# EAGLE board SparkFun_Lipo_Fuel_Gauge-Panel (EAGLE 9.6.2), part 1 of 5
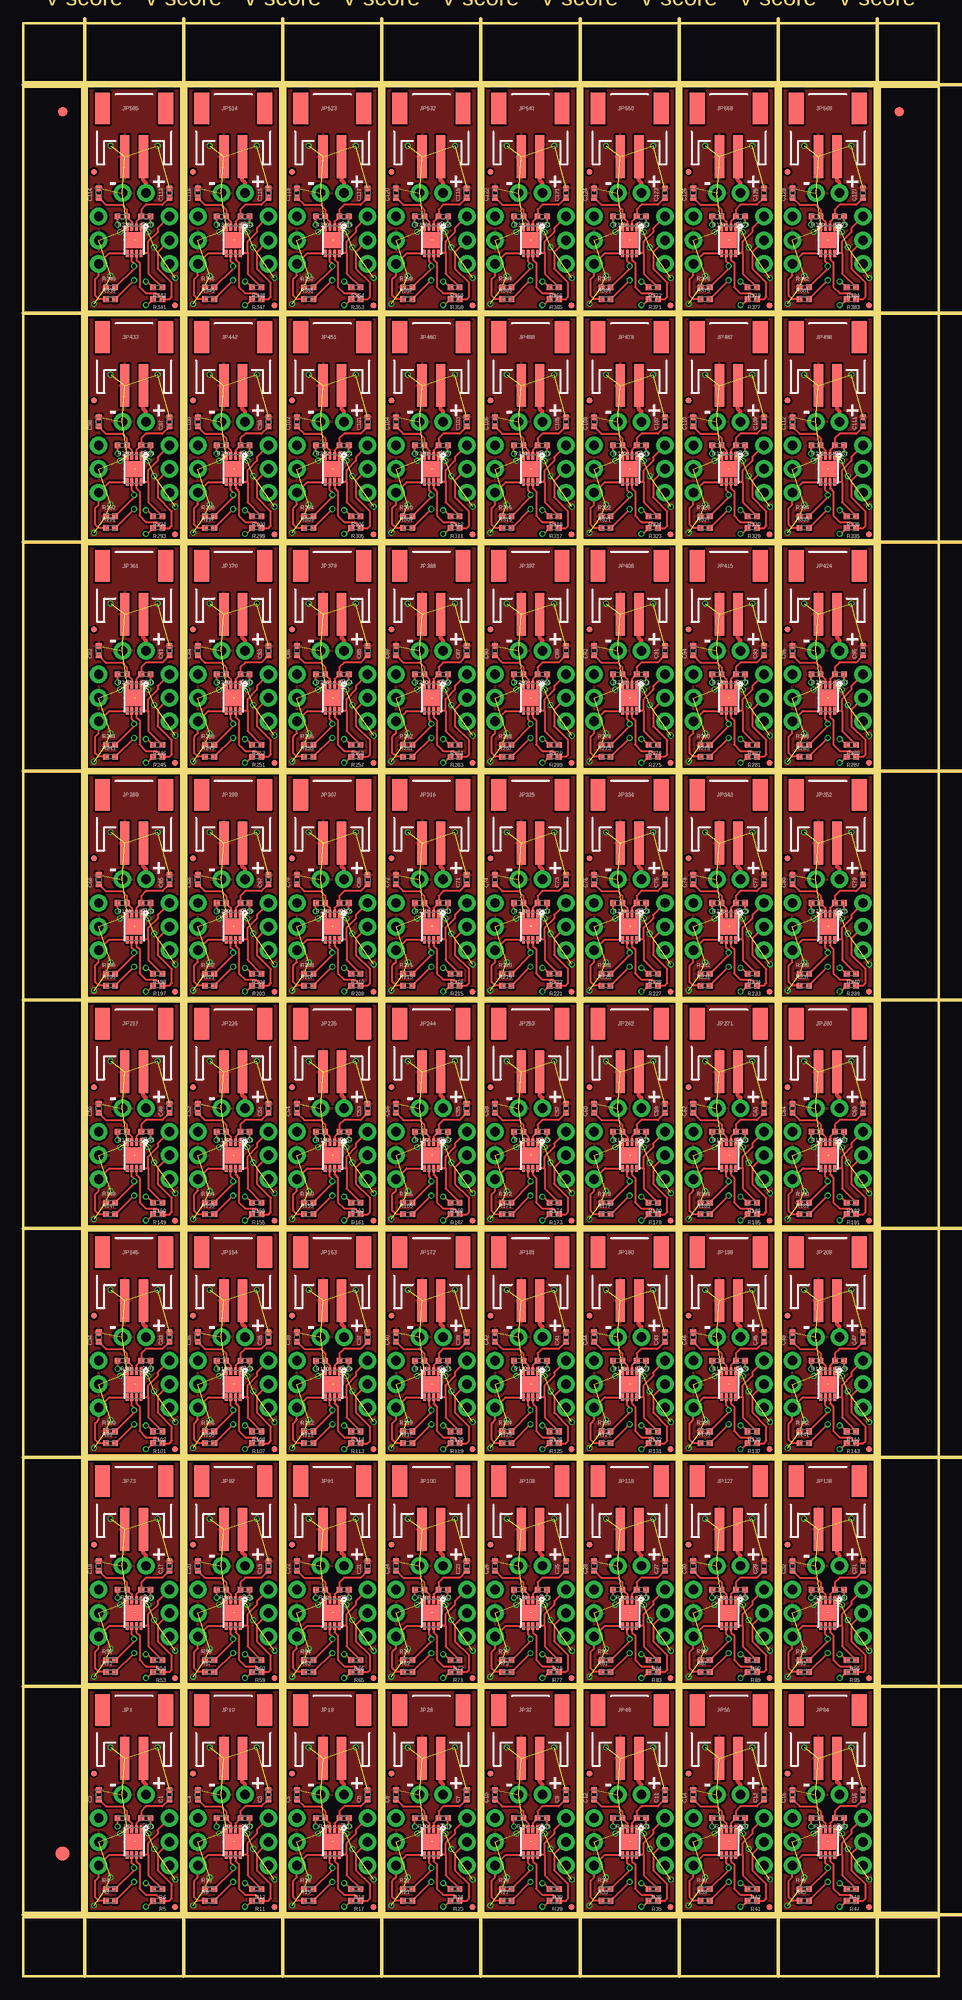
[diagram p0: board, top side]
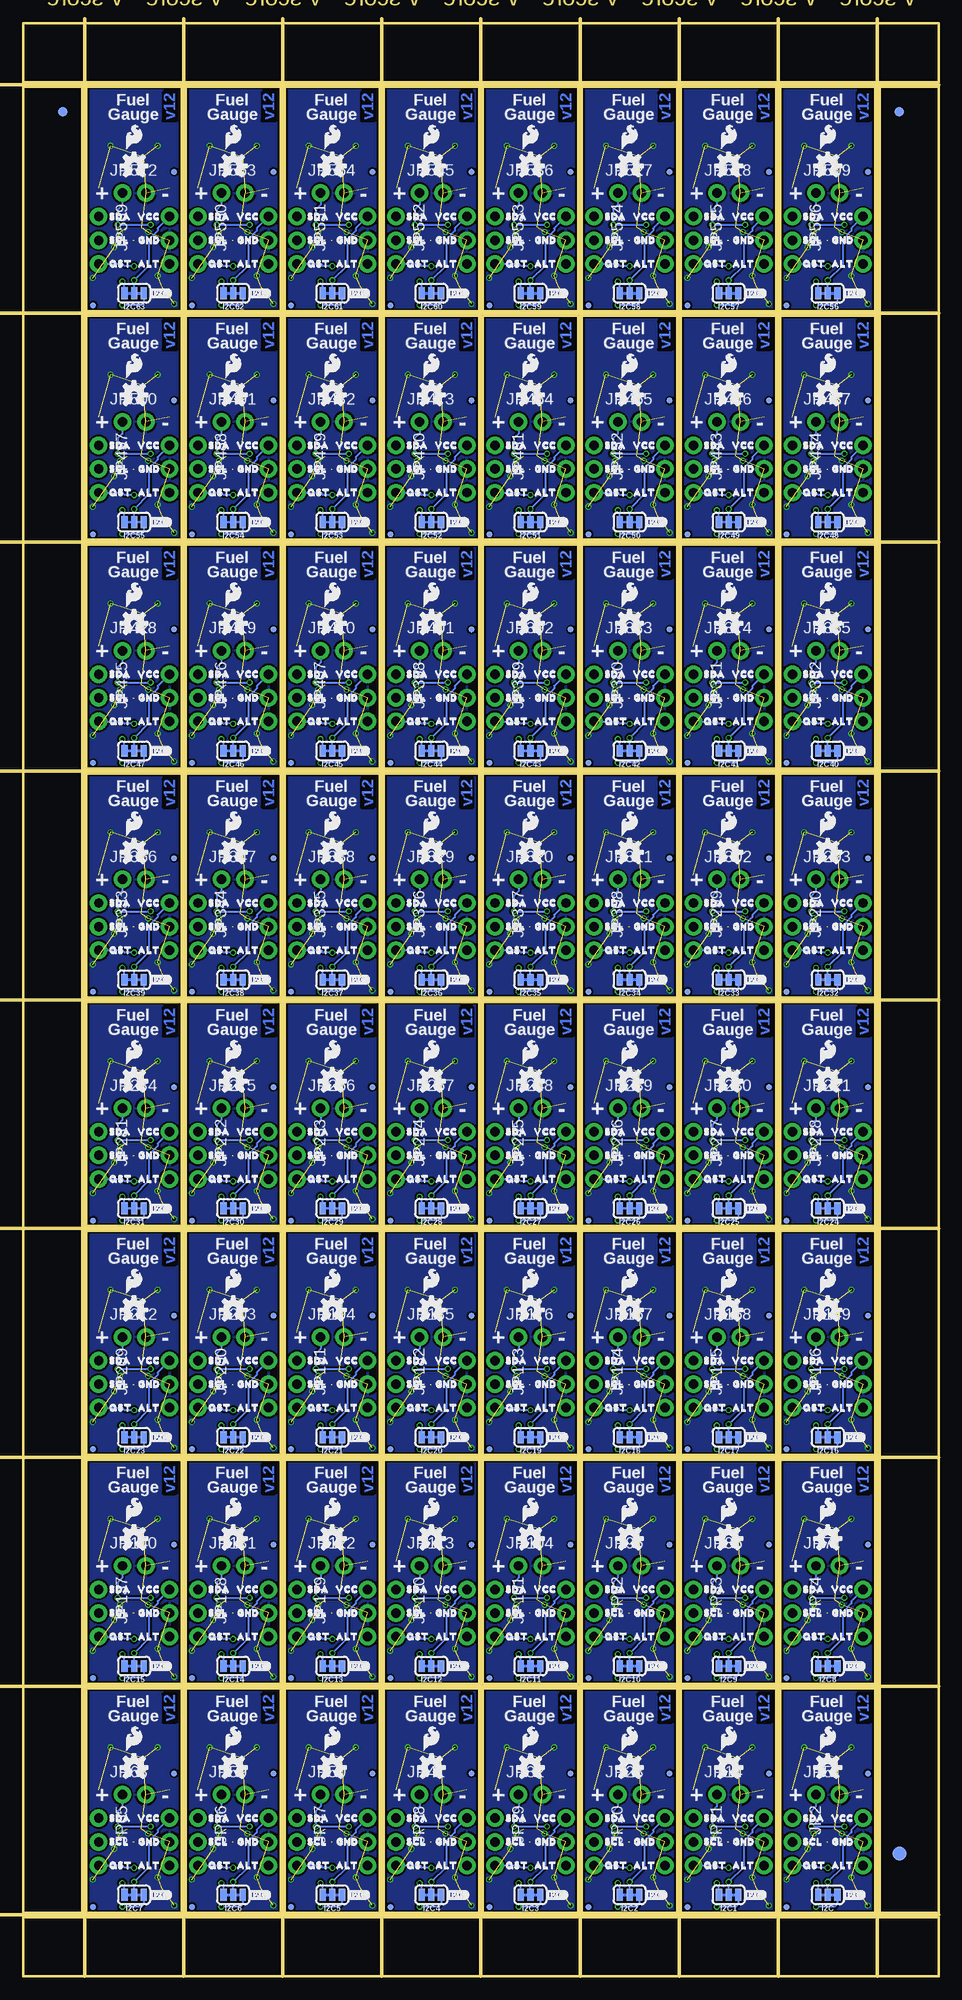
[diagram p1: board, bottom side, seen from below]

Size 98.55 x 210.31 mm. Coordinates in mm from the lower left corner, seen from the top.
Outline: 272 segments
Copper layers (1*16): Top 0.035mm / dielectric 1.5mm / Bottom 0.035mm
Design rules "SparkFun_Lipo_Fuel_Gauge": minimum track width 5mil, minimum drill 0.3mm, track to track 5mil, track to pad 5mil, pad to pad 5mil, via to via 5mil, smd to smd 5mil, copper to edge 7mil, drill to drill 7mil, minimum pad ring 5mil, minimum via ring 5mil, stop-mask expansion 2.5mil, vias tented up to drill 25mil, thermal gap 10mil
Milling: 18 lines

## Footprints (pad centres in the part's own frame; a part is rotated, then mirrored left to right if it is on the bottom)
0402-TIGHT = smd 0.6 x 0.6: 1 -0.5,0; 2 0.5,0
FIDUCIAL-1X2 = smd 1 x 1: 1 0,0
FIDUCIAL-1.5X3 = smd 1.5 x 1.5: 1 0,0
SMT-JUMPER_3_2-NC_TRACE_SILK = smd 0.66 x 1.27: 1 -1.041,0; 2 0,0; 3 1.041,0
JST-2-SMD = smd 1 x 4.6: 1 -1,-3.7; 2 1,-3.7 | smd 1.6 x 3.4: NC1 -3.4,1.5; NC2 3.4,1.5
1X03_NO_SILK = drill 1.016 pad 1.88: 1 0,0; 2 2.54,0; 3 5.08,0
1X02_NO_SILK = drill 1.016 pad 1.88: 1 0,0; 2 2.54,0
FIDUCIAL-MICRO = smd 0.635 x 0.635: 1 0,0
TDFN-8 = smd 0.8 x 0.3: 1 -1.4,0.75; 2 -1.4,0.25; 3 -1.4,-0.25; 4 -1.4,-0.75; 5 1.4,-0.75; 6 1.4,-0.25; 7 1.4,0.25; 8 1.4,0.75 | smd 1.73 x 1.88: EP 0,0

## Placement (x,y rotation side)
C1  1.0uF  [0402-TIGHT]  15.75,19.56 90 top
C2  10nF  [0402-TIGHT]  8.13,19.56 90 top
C3  1.0uF  [0402-TIGHT]  26.42,19.56 90 top
C4  10nF  [0402-TIGHT]  18.8,19.56 90 top
C5  1.0uF  [0402-TIGHT]  37.08,19.56 90 top
C6  10nF  [0402-TIGHT]  29.46,19.56 90 top
C7  1.0uF  [0402-TIGHT]  47.75,19.56 90 top
C8  10nF  [0402-TIGHT]  40.13,19.56 90 top
C9  1.0uF  [0402-TIGHT]  58.42,19.56 90 top
C10  10nF  [0402-TIGHT]  50.8,19.56 90 top
C11  1.0uF  [0402-TIGHT]  69.09,19.56 90 top
C12  10nF  [0402-TIGHT]  61.47,19.56 90 top
C13  1.0uF  [0402-TIGHT]  79.76,19.56 90 top
C14  10nF  [0402-TIGHT]  72.14,19.56 90 top
C15  1.0uF  [0402-TIGHT]  90.42,19.56 90 top
C16  10nF  [0402-TIGHT]  82.8,19.56 90 top
C17  1.0uF  [0402-TIGHT]  15.75,44.2 90 top
C18  10nF  [0402-TIGHT]  8.13,44.2 90 top
C19  1.0uF  [0402-TIGHT]  26.42,44.2 90 top
C20  10nF  [0402-TIGHT]  18.8,44.2 90 top
C21  1.0uF  [0402-TIGHT]  37.08,44.2 90 top
C22  10nF  [0402-TIGHT]  29.46,44.2 90 top
C23  1.0uF  [0402-TIGHT]  47.75,44.2 90 top
C24  10nF  [0402-TIGHT]  40.13,44.2 90 top
C25  1.0uF  [0402-TIGHT]  58.42,44.2 90 top
C26  10nF  [0402-TIGHT]  50.8,44.2 90 top
C27  1.0uF  [0402-TIGHT]  69.09,44.2 90 top
C28  10nF  [0402-TIGHT]  61.47,44.2 90 top
C29  1.0uF  [0402-TIGHT]  79.76,44.2 90 top
C30  10nF  [0402-TIGHT]  72.14,44.2 90 top
C31  1.0uF  [0402-TIGHT]  90.42,44.2 90 top
C32  10nF  [0402-TIGHT]  82.8,44.2 90 top
C33  1.0uF  [0402-TIGHT]  15.75,68.83 90 top
C34  10nF  [0402-TIGHT]  8.13,68.83 90 top
C35  1.0uF  [0402-TIGHT]  26.42,68.83 90 top
C36  10nF  [0402-TIGHT]  18.8,68.83 90 top
C37  1.0uF  [0402-TIGHT]  37.08,68.83 90 top
C38  10nF  [0402-TIGHT]  29.46,68.83 90 top
C39  1.0uF  [0402-TIGHT]  47.75,68.83 90 top
C40  10nF  [0402-TIGHT]  40.13,68.83 90 top
C41  1.0uF  [0402-TIGHT]  58.42,68.83 90 top
C42  10nF  [0402-TIGHT]  50.8,68.83 90 top
C43  1.0uF  [0402-TIGHT]  69.09,68.83 90 top
C44  10nF  [0402-TIGHT]  61.47,68.83 90 top
C45  1.0uF  [0402-TIGHT]  79.76,68.83 90 top
C46  10nF  [0402-TIGHT]  72.14,68.83 90 top
C47  1.0uF  [0402-TIGHT]  90.42,68.83 90 top
C48  10nF  [0402-TIGHT]  82.8,68.83 90 top
C49  1.0uF  [0402-TIGHT]  15.75,93.47 90 top
C50  10nF  [0402-TIGHT]  8.13,93.47 90 top
C51  1.0uF  [0402-TIGHT]  26.42,93.47 90 top
C52  10nF  [0402-TIGHT]  18.8,93.47 90 top
C53  1.0uF  [0402-TIGHT]  37.08,93.47 90 top
C54  10nF  [0402-TIGHT]  29.46,93.47 90 top
C55  1.0uF  [0402-TIGHT]  47.75,93.47 90 top
C56  10nF  [0402-TIGHT]  40.13,93.47 90 top
C57  1.0uF  [0402-TIGHT]  58.42,93.47 90 top
C58  10nF  [0402-TIGHT]  50.8,93.47 90 top
C59  1.0uF  [0402-TIGHT]  69.09,93.47 90 top
C60  10nF  [0402-TIGHT]  61.47,93.47 90 top
C61  1.0uF  [0402-TIGHT]  79.76,93.47 90 top
C62  10nF  [0402-TIGHT]  72.14,93.47 90 top
C63  1.0uF  [0402-TIGHT]  90.42,93.47 90 top
C64  10nF  [0402-TIGHT]  82.8,93.47 90 top
C65  1.0uF  [0402-TIGHT]  15.75,118.11 90 top
C66  10nF  [0402-TIGHT]  8.13,118.11 90 top
C67  1.0uF  [0402-TIGHT]  26.42,118.11 90 top
C68  10nF  [0402-TIGHT]  18.8,118.11 90 top
C69  1.0uF  [0402-TIGHT]  37.08,118.11 90 top
C70  10nF  [0402-TIGHT]  29.46,118.11 90 top
C71  1.0uF  [0402-TIGHT]  47.75,118.11 90 top
C72  10nF  [0402-TIGHT]  40.13,118.11 90 top
C73  1.0uF  [0402-TIGHT]  58.42,118.11 90 top
C74  10nF  [0402-TIGHT]  50.8,118.11 90 top
C75  1.0uF  [0402-TIGHT]  69.09,118.11 90 top
C76  10nF  [0402-TIGHT]  61.47,118.11 90 top
C77  1.0uF  [0402-TIGHT]  79.76,118.11 90 top
C78  10nF  [0402-TIGHT]  72.14,118.11 90 top
C79  1.0uF  [0402-TIGHT]  90.42,118.11 90 top
C80  10nF  [0402-TIGHT]  82.8,118.11 90 top
C81  1.0uF  [0402-TIGHT]  15.75,142.75 90 top
C82  10nF  [0402-TIGHT]  8.13,142.75 90 top
C83  1.0uF  [0402-TIGHT]  26.42,142.75 90 top
C84  10nF  [0402-TIGHT]  18.8,142.75 90 top
C85  1.0uF  [0402-TIGHT]  37.08,142.75 90 top
C86  10nF  [0402-TIGHT]  29.46,142.75 90 top
C87  1.0uF  [0402-TIGHT]  47.75,142.75 90 top
C88  10nF  [0402-TIGHT]  40.13,142.75 90 top
C89  1.0uF  [0402-TIGHT]  58.42,142.75 90 top
C90  10nF  [0402-TIGHT]  50.8,142.75 90 top
C91  1.0uF  [0402-TIGHT]  69.09,142.75 90 top
C92  10nF  [0402-TIGHT]  61.47,142.75 90 top
C93  1.0uF  [0402-TIGHT]  79.76,142.75 90 top
C94  10nF  [0402-TIGHT]  72.14,142.75 90 top
C95  1.0uF  [0402-TIGHT]  90.42,142.75 90 top
C96  10nF  [0402-TIGHT]  82.8,142.75 90 top
C97  1.0uF  [0402-TIGHT]  15.75,167.39 90 top
C98  10nF  [0402-TIGHT]  8.13,167.39 90 top
C99  1.0uF  [0402-TIGHT]  26.42,167.39 90 top
C100  10nF  [0402-TIGHT]  18.8,167.39 90 top
C101  1.0uF  [0402-TIGHT]  37.08,167.39 90 top
C102  10nF  [0402-TIGHT]  29.46,167.39 90 top
C103  1.0uF  [0402-TIGHT]  47.75,167.39 90 top
C104  10nF  [0402-TIGHT]  40.13,167.39 90 top
C105  1.0uF  [0402-TIGHT]  58.42,167.39 90 top
C106  10nF  [0402-TIGHT]  50.8,167.39 90 top
C107  1.0uF  [0402-TIGHT]  69.09,167.39 90 top
C108  10nF  [0402-TIGHT]  61.47,167.39 90 top
C109  1.0uF  [0402-TIGHT]  79.76,167.39 90 top
C110  10nF  [0402-TIGHT]  72.14,167.39 90 top
C111  1.0uF  [0402-TIGHT]  90.42,167.39 90 top
C112  10nF  [0402-TIGHT]  82.8,167.39 90 top
C113  1.0uF  [0402-TIGHT]  15.75,192.02 90 top
C114  10nF  [0402-TIGHT]  8.13,192.02 90 top
C115  1.0uF  [0402-TIGHT]  26.42,192.02 90 top
C116  10nF  [0402-TIGHT]  18.8,192.02 90 top
C117  1.0uF  [0402-TIGHT]  37.08,192.02 90 top
C118  10nF  [0402-TIGHT]  29.46,192.02 90 top
C119  1.0uF  [0402-TIGHT]  47.75,192.02 90 top
C120  10nF  [0402-TIGHT]  40.13,192.02 90 top
C121  1.0uF  [0402-TIGHT]  58.42,192.02 90 top
C122  10nF  [0402-TIGHT]  50.8,192.02 90 top
C123  1.0uF  [0402-TIGHT]  69.09,192.02 90 top
C124  10nF  [0402-TIGHT]  61.47,192.02 90 top
C125  1.0uF  [0402-TIGHT]  79.76,192.02 90 top
C126  10nF  [0402-TIGHT]  72.14,192.02 90 top
C127  1.0uF  [0402-TIGHT]  90.42,192.02 90 top
C128  10nF  [0402-TIGHT]  82.8,192.02 90 top
E$1  [FIDUCIAL-1X2]  4.23,200.79 0 top
E$2  [FIDUCIAL-1X2]  4.23,200.79 0 bottom
E$3  [FIDUCIAL-1X2]  94.32,200.79 0 top
E$4  [FIDUCIAL-1X2]  94.32,200.79 0 bottom
E$5  [FIDUCIAL-1.5X3]  4.23,13.21 0 top
E$6  [FIDUCIAL-1.5X3]  4.23,13.21 0 bottom
I2C  JUMPER-SMT_3_2-NC_TRACE_SILK  [SMT-JUMPER_3_2-NC_TRACE_SILK]  11.94,8.76 180 bottom
I2C1  JUMPER-SMT_3_2-NC_TRACE_SILK  [SMT-JUMPER_3_2-NC_TRACE_SILK]  22.61,8.76 180 bottom
I2C2  JUMPER-SMT_3_2-NC_TRACE_SILK  [SMT-JUMPER_3_2-NC_TRACE_SILK]  33.27,8.76 180 bottom
I2C3  JUMPER-SMT_3_2-NC_TRACE_SILK  [SMT-JUMPER_3_2-NC_TRACE_SILK]  43.94,8.76 180 bottom
I2C4  JUMPER-SMT_3_2-NC_TRACE_SILK  [SMT-JUMPER_3_2-NC_TRACE_SILK]  54.61,8.76 180 bottom
I2C5  JUMPER-SMT_3_2-NC_TRACE_SILK  [SMT-JUMPER_3_2-NC_TRACE_SILK]  65.28,8.76 180 bottom
I2C6  JUMPER-SMT_3_2-NC_TRACE_SILK  [SMT-JUMPER_3_2-NC_TRACE_SILK]  75.95,8.76 180 bottom
I2C7  JUMPER-SMT_3_2-NC_TRACE_SILK  [SMT-JUMPER_3_2-NC_TRACE_SILK]  86.61,8.76 180 bottom
I2C8  JUMPER-SMT_3_2-NC_TRACE_SILK  [SMT-JUMPER_3_2-NC_TRACE_SILK]  11.94,33.4 180 bottom
I2C9  JUMPER-SMT_3_2-NC_TRACE_SILK  [SMT-JUMPER_3_2-NC_TRACE_SILK]  22.61,33.4 180 bottom
I2C10  JUMPER-SMT_3_2-NC_TRACE_SILK  [SMT-JUMPER_3_2-NC_TRACE_SILK]  33.27,33.4 180 bottom
I2C11  JUMPER-SMT_3_2-NC_TRACE_SILK  [SMT-JUMPER_3_2-NC_TRACE_SILK]  43.94,33.4 180 bottom
I2C12  JUMPER-SMT_3_2-NC_TRACE_SILK  [SMT-JUMPER_3_2-NC_TRACE_SILK]  54.61,33.4 180 bottom
I2C13  JUMPER-SMT_3_2-NC_TRACE_SILK  [SMT-JUMPER_3_2-NC_TRACE_SILK]  65.28,33.4 180 bottom
I2C14  JUMPER-SMT_3_2-NC_TRACE_SILK  [SMT-JUMPER_3_2-NC_TRACE_SILK]  75.95,33.4 180 bottom
I2C15  JUMPER-SMT_3_2-NC_TRACE_SILK  [SMT-JUMPER_3_2-NC_TRACE_SILK]  86.61,33.4 180 bottom
I2C16  JUMPER-SMT_3_2-NC_TRACE_SILK  [SMT-JUMPER_3_2-NC_TRACE_SILK]  11.94,58.04 180 bottom
I2C17  JUMPER-SMT_3_2-NC_TRACE_SILK  [SMT-JUMPER_3_2-NC_TRACE_SILK]  22.61,58.04 180 bottom
I2C18  JUMPER-SMT_3_2-NC_TRACE_SILK  [SMT-JUMPER_3_2-NC_TRACE_SILK]  33.27,58.04 180 bottom
I2C19  JUMPER-SMT_3_2-NC_TRACE_SILK  [SMT-JUMPER_3_2-NC_TRACE_SILK]  43.94,58.04 180 bottom
I2C20  JUMPER-SMT_3_2-NC_TRACE_SILK  [SMT-JUMPER_3_2-NC_TRACE_SILK]  54.61,58.04 180 bottom
I2C21  JUMPER-SMT_3_2-NC_TRACE_SILK  [SMT-JUMPER_3_2-NC_TRACE_SILK]  65.28,58.04 180 bottom
I2C22  JUMPER-SMT_3_2-NC_TRACE_SILK  [SMT-JUMPER_3_2-NC_TRACE_SILK]  75.95,58.04 180 bottom
I2C23  JUMPER-SMT_3_2-NC_TRACE_SILK  [SMT-JUMPER_3_2-NC_TRACE_SILK]  86.61,58.04 180 bottom
I2C24  JUMPER-SMT_3_2-NC_TRACE_SILK  [SMT-JUMPER_3_2-NC_TRACE_SILK]  11.94,82.68 180 bottom
I2C25  JUMPER-SMT_3_2-NC_TRACE_SILK  [SMT-JUMPER_3_2-NC_TRACE_SILK]  22.61,82.68 180 bottom
I2C26  JUMPER-SMT_3_2-NC_TRACE_SILK  [SMT-JUMPER_3_2-NC_TRACE_SILK]  33.27,82.68 180 bottom
I2C27  JUMPER-SMT_3_2-NC_TRACE_SILK  [SMT-JUMPER_3_2-NC_TRACE_SILK]  43.94,82.68 180 bottom
I2C28  JUMPER-SMT_3_2-NC_TRACE_SILK  [SMT-JUMPER_3_2-NC_TRACE_SILK]  54.61,82.68 180 bottom
I2C29  JUMPER-SMT_3_2-NC_TRACE_SILK  [SMT-JUMPER_3_2-NC_TRACE_SILK]  65.28,82.68 180 bottom
I2C30  JUMPER-SMT_3_2-NC_TRACE_SILK  [SMT-JUMPER_3_2-NC_TRACE_SILK]  75.95,82.68 180 bottom
I2C31  JUMPER-SMT_3_2-NC_TRACE_SILK  [SMT-JUMPER_3_2-NC_TRACE_SILK]  86.61,82.68 180 bottom
I2C32  JUMPER-SMT_3_2-NC_TRACE_SILK  [SMT-JUMPER_3_2-NC_TRACE_SILK]  11.94,107.31 180 bottom
I2C33  JUMPER-SMT_3_2-NC_TRACE_SILK  [SMT-JUMPER_3_2-NC_TRACE_SILK]  22.61,107.31 180 bottom
I2C34  JUMPER-SMT_3_2-NC_TRACE_SILK  [SMT-JUMPER_3_2-NC_TRACE_SILK]  33.27,107.31 180 bottom
I2C35  JUMPER-SMT_3_2-NC_TRACE_SILK  [SMT-JUMPER_3_2-NC_TRACE_SILK]  43.94,107.31 180 bottom
I2C36  JUMPER-SMT_3_2-NC_TRACE_SILK  [SMT-JUMPER_3_2-NC_TRACE_SILK]  54.61,107.31 180 bottom
I2C37  JUMPER-SMT_3_2-NC_TRACE_SILK  [SMT-JUMPER_3_2-NC_TRACE_SILK]  65.28,107.31 180 bottom
I2C38  JUMPER-SMT_3_2-NC_TRACE_SILK  [SMT-JUMPER_3_2-NC_TRACE_SILK]  75.95,107.31 180 bottom
I2C39  JUMPER-SMT_3_2-NC_TRACE_SILK  [SMT-JUMPER_3_2-NC_TRACE_SILK]  86.61,107.31 180 bottom
I2C40  JUMPER-SMT_3_2-NC_TRACE_SILK  [SMT-JUMPER_3_2-NC_TRACE_SILK]  11.94,131.95 180 bottom
I2C41  JUMPER-SMT_3_2-NC_TRACE_SILK  [SMT-JUMPER_3_2-NC_TRACE_SILK]  22.61,131.95 180 bottom
I2C42  JUMPER-SMT_3_2-NC_TRACE_SILK  [SMT-JUMPER_3_2-NC_TRACE_SILK]  33.27,131.95 180 bottom
I2C43  JUMPER-SMT_3_2-NC_TRACE_SILK  [SMT-JUMPER_3_2-NC_TRACE_SILK]  43.94,131.95 180 bottom
I2C44  JUMPER-SMT_3_2-NC_TRACE_SILK  [SMT-JUMPER_3_2-NC_TRACE_SILK]  54.61,131.95 180 bottom
I2C45  JUMPER-SMT_3_2-NC_TRACE_SILK  [SMT-JUMPER_3_2-NC_TRACE_SILK]  65.28,131.95 180 bottom
I2C46  JUMPER-SMT_3_2-NC_TRACE_SILK  [SMT-JUMPER_3_2-NC_TRACE_SILK]  75.95,131.95 180 bottom
I2C47  JUMPER-SMT_3_2-NC_TRACE_SILK  [SMT-JUMPER_3_2-NC_TRACE_SILK]  86.61,131.95 180 bottom
I2C48  JUMPER-SMT_3_2-NC_TRACE_SILK  [SMT-JUMPER_3_2-NC_TRACE_SILK]  11.94,156.59 180 bottom
I2C49  JUMPER-SMT_3_2-NC_TRACE_SILK  [SMT-JUMPER_3_2-NC_TRACE_SILK]  22.61,156.59 180 bottom
I2C50  JUMPER-SMT_3_2-NC_TRACE_SILK  [SMT-JUMPER_3_2-NC_TRACE_SILK]  33.27,156.59 180 bottom
I2C51  JUMPER-SMT_3_2-NC_TRACE_SILK  [SMT-JUMPER_3_2-NC_TRACE_SILK]  43.94,156.59 180 bottom
I2C52  JUMPER-SMT_3_2-NC_TRACE_SILK  [SMT-JUMPER_3_2-NC_TRACE_SILK]  54.61,156.59 180 bottom
I2C53  JUMPER-SMT_3_2-NC_TRACE_SILK  [SMT-JUMPER_3_2-NC_TRACE_SILK]  65.28,156.59 180 bottom
I2C54  JUMPER-SMT_3_2-NC_TRACE_SILK  [SMT-JUMPER_3_2-NC_TRACE_SILK]  75.95,156.59 180 bottom
I2C55  JUMPER-SMT_3_2-NC_TRACE_SILK  [SMT-JUMPER_3_2-NC_TRACE_SILK]  86.61,156.59 180 bottom
I2C56  JUMPER-SMT_3_2-NC_TRACE_SILK  [SMT-JUMPER_3_2-NC_TRACE_SILK]  11.94,181.23 180 bottom
I2C57  JUMPER-SMT_3_2-NC_TRACE_SILK  [SMT-JUMPER_3_2-NC_TRACE_SILK]  22.61,181.23 180 bottom
I2C58  JUMPER-SMT_3_2-NC_TRACE_SILK  [SMT-JUMPER_3_2-NC_TRACE_SILK]  33.27,181.23 180 bottom
I2C59  JUMPER-SMT_3_2-NC_TRACE_SILK  [SMT-JUMPER_3_2-NC_TRACE_SILK]  43.94,181.23 180 bottom
I2C60  JUMPER-SMT_3_2-NC_TRACE_SILK  [SMT-JUMPER_3_2-NC_TRACE_SILK]  54.61,181.23 180 bottom
I2C61  JUMPER-SMT_3_2-NC_TRACE_SILK  [SMT-JUMPER_3_2-NC_TRACE_SILK]  65.28,181.23 180 bottom
I2C62  JUMPER-SMT_3_2-NC_TRACE_SILK  [SMT-JUMPER_3_2-NC_TRACE_SILK]  75.95,181.23 180 bottom
I2C63  JUMPER-SMT_3_2-NC_TRACE_SILK  [SMT-JUMPER_3_2-NC_TRACE_SILK]  86.61,181.23 180 bottom
JP1  input  [JST-2-SMD]  11.94,27.18 0 top
JP2  [1X03_NO_SILK]  15.75,17.02 270 bottom
JP3  SFE_LOGO_FLAME.1_INCH  [SFE_LOGO_FLAME_.1]  11.94,25.6 0 bottom
JP4  [1X03_NO_SILK]  8.13,17.02 270 bottom
JP5  [1X02_NO_SILK]  13.21,19.56 0 bottom
JP6  FIDUCIALUFIDUCIAL  [FIDUCIAL-MICRO]  16.36,7.47 0 top
JP7  FIDUCIALUFIDUCIAL  [FIDUCIAL-MICRO]  7.62,21.84 0 top
JP8  FIDUCIALUFIDUCIAL  [FIDUCIAL-MICRO]  7.62,21.84 0 bottom
JP9  FIDUCIALUFIDUCIAL  [FIDUCIAL-MICRO]  16.36,7.47 0 bottom
JP10  input  [JST-2-SMD]  22.61,27.18 0 top
JP11  [1X03_NO_SILK]  26.42,17.02 270 bottom
JP12  [1X03_NO_SILK]  18.8,17.02 270 bottom
JP13  SFE_LOGO_FLAME.1_INCH  [SFE_LOGO_FLAME_.1]  22.61,25.6 0 bottom
JP14  [1X02_NO_SILK]  23.88,19.56 0 bottom
JP15  FIDUCIALUFIDUCIAL  [FIDUCIAL-MICRO]  27.03,7.47 0 top
JP16  FIDUCIALUFIDUCIAL  [FIDUCIAL-MICRO]  18.29,21.84 0 top
JP17  FIDUCIALUFIDUCIAL  [FIDUCIAL-MICRO]  18.29,21.84 0 bottom
JP18  FIDUCIALUFIDUCIAL  [FIDUCIAL-MICRO]  27.03,7.47 0 bottom
JP19  input  [JST-2-SMD]  33.27,27.18 0 top
JP20  [1X03_NO_SILK]  37.08,17.02 270 bottom
JP21  [1X03_NO_SILK]  29.46,17.02 270 bottom
JP22  SFE_LOGO_FLAME.1_INCH  [SFE_LOGO_FLAME_.1]  33.27,25.6 0 bottom
JP23  [1X02_NO_SILK]  34.54,19.56 0 bottom
JP24  FIDUCIALUFIDUCIAL  [FIDUCIAL-MICRO]  37.69,7.47 0 top
JP25  FIDUCIALUFIDUCIAL  [FIDUCIAL-MICRO]  28.96,21.84 0 top
JP26  FIDUCIALUFIDUCIAL  [FIDUCIAL-MICRO]  28.96,21.84 0 bottom
JP27  FIDUCIALUFIDUCIAL  [FIDUCIAL-MICRO]  37.69,7.47 0 bottom
JP28  input  [JST-2-SMD]  43.94,27.18 0 top
JP29  [1X03_NO_SILK]  47.75,17.02 270 bottom
JP30  [1X03_NO_SILK]  40.13,17.02 270 bottom
JP31  SFE_LOGO_FLAME.1_INCH  [SFE_LOGO_FLAME_.1]  43.94,25.6 0 bottom
JP32  [1X02_NO_SILK]  45.21,19.56 0 bottom
JP33  FIDUCIALUFIDUCIAL  [FIDUCIAL-MICRO]  48.36,7.47 0 top
JP34  FIDUCIALUFIDUCIAL  [FIDUCIAL-MICRO]  39.62,21.84 0 top
JP35  FIDUCIALUFIDUCIAL  [FIDUCIAL-MICRO]  39.62,21.84 0 bottom
JP36  FIDUCIALUFIDUCIAL  [FIDUCIAL-MICRO]  48.36,7.47 0 bottom
JP37  input  [JST-2-SMD]  54.61,27.18 0 top
JP38  [1X03_NO_SILK]  58.42,17.02 270 bottom
JP39  [1X03_NO_SILK]  50.8,17.02 270 bottom
JP40  SFE_LOGO_FLAME.1_INCH  [SFE_LOGO_FLAME_.1]  54.61,25.6 0 bottom
JP41  [1X02_NO_SILK]  55.88,19.56 0 bottom
JP42  FIDUCIALUFIDUCIAL  [FIDUCIAL-MICRO]  59.03,7.47 0 top
JP43  FIDUCIALUFIDUCIAL  [FIDUCIAL-MICRO]  50.29,21.84 0 top
JP44  FIDUCIALUFIDUCIAL  [FIDUCIAL-MICRO]  50.29,21.84 0 bottom
JP45  FIDUCIALUFIDUCIAL  [FIDUCIAL-MICRO]  59.03,7.47 0 bottom
JP46  input  [JST-2-SMD]  65.28,27.18 0 top
JP47  [1X03_NO_SILK]  69.09,17.02 270 bottom
JP48  [1X03_NO_SILK]  61.47,17.02 270 bottom
JP49  SFE_LOGO_FLAME.1_INCH  [SFE_LOGO_FLAME_.1]  65.28,25.6 0 bottom
JP50  [1X02_NO_SILK]  66.55,19.56 0 bottom
JP51  FIDUCIALUFIDUCIAL  [FIDUCIAL-MICRO]  69.7,7.47 0 top
JP52  FIDUCIALUFIDUCIAL  [FIDUCIAL-MICRO]  60.96,21.84 0 top
JP53  FIDUCIALUFIDUCIAL  [FIDUCIAL-MICRO]  60.96,21.84 0 bottom
JP54  FIDUCIALUFIDUCIAL  [FIDUCIAL-MICRO]  69.7,7.47 0 bottom
JP55  input  [JST-2-SMD]  75.95,27.18 0 top
JP56  [1X03_NO_SILK]  79.76,17.02 270 bottom
JP57  [1X03_NO_SILK]  72.14,17.02 270 bottom
JP58  SFE_LOGO_FLAME.1_INCH  [SFE_LOGO_FLAME_.1]  75.95,25.6 0 bottom
JP59  [1X02_NO_SILK]  77.22,19.56 0 bottom
JP60  FIDUCIALUFIDUCIAL  [FIDUCIAL-MICRO]  80.37,7.47 0 top
JP61  FIDUCIALUFIDUCIAL  [FIDUCIAL-MICRO]  71.63,21.84 0 top
JP62  FIDUCIALUFIDUCIAL  [FIDUCIAL-MICRO]  71.63,21.84 0 bottom
JP63  FIDUCIALUFIDUCIAL  [FIDUCIAL-MICRO]  80.37,7.47 0 bottom
JP64  input  [JST-2-SMD]  86.61,27.18 0 top
JP65  [1X03_NO_SILK]  90.42,17.02 270 bottom
JP66  [1X03_NO_SILK]  82.8,17.02 270 bottom
JP67  SFE_LOGO_FLAME.1_INCH  [SFE_LOGO_FLAME_.1]  86.61,25.6 0 bottom
JP68  [1X02_NO_SILK]  87.88,19.56 0 bottom
JP69  FIDUCIALUFIDUCIAL  [FIDUCIAL-MICRO]  91.03,7.47 0 top
JP70  FIDUCIALUFIDUCIAL  [FIDUCIAL-MICRO]  82.3,21.84 0 top
JP71  FIDUCIALUFIDUCIAL  [FIDUCIAL-MICRO]  82.3,21.84 0 bottom
JP72  FIDUCIALUFIDUCIAL  [FIDUCIAL-MICRO]  91.03,7.47 0 bottom
JP73  input  [JST-2-SMD]  11.94,51.82 0 top
JP74  [1X03_NO_SILK]  15.75,41.66 270 bottom
JP75  [1X03_NO_SILK]  8.13,41.66 270 bottom
JP76  SFE_LOGO_FLAME.1_INCH  [SFE_LOGO_FLAME_.1]  11.94,50.24 0 bottom
JP77  [1X02_NO_SILK]  13.21,44.2 0 bottom
JP78  FIDUCIALUFIDUCIAL  [FIDUCIAL-MICRO]  16.36,32.11 0 top
JP79  FIDUCIALUFIDUCIAL  [FIDUCIAL-MICRO]  7.62,46.48 0 top
JP80  FIDUCIALUFIDUCIAL  [FIDUCIAL-MICRO]  7.62,46.48 0 bottom
JP81  FIDUCIALUFIDUCIAL  [FIDUCIAL-MICRO]  16.36,32.11 0 bottom
JP82  input  [JST-2-SMD]  22.61,51.82 0 top
JP83  [1X03_NO_SILK]  26.42,41.66 270 bottom
JP84  [1X03_NO_SILK]  18.8,41.66 270 bottom
JP85  SFE_LOGO_FLAME.1_INCH  [SFE_LOGO_FLAME_.1]  22.61,50.24 0 bottom
JP86  [1X02_NO_SILK]  23.88,44.2 0 bottom
JP87  FIDUCIALUFIDUCIAL  [FIDUCIAL-MICRO]  27.03,32.11 0 top
JP88  FIDUCIALUFIDUCIAL  [FIDUCIAL-MICRO]  18.29,46.48 0 top
JP89  FIDUCIALUFIDUCIAL  [FIDUCIAL-MICRO]  18.29,46.48 0 bottom
JP90  FIDUCIALUFIDUCIAL  [FIDUCIAL-MICRO]  27.03,32.11 0 bottom
JP91  input  [JST-2-SMD]  33.27,51.82 0 top
JP92  [1X03_NO_SILK]  37.08,41.66 270 bottom
JP93  [1X03_NO_SILK]  29.46,41.66 270 bottom
JP94  SFE_LOGO_FLAME.1_INCH  [SFE_LOGO_FLAME_.1]  33.27,50.24 0 bottom
JP95  [1X02_NO_SILK]  34.54,44.2 0 bottom
JP96  FIDUCIALUFIDUCIAL  [FIDUCIAL-MICRO]  37.69,32.11 0 top
JP97  FIDUCIALUFIDUCIAL  [FIDUCIAL-MICRO]  28.96,46.48 0 top
JP98  FIDUCIALUFIDUCIAL  [FIDUCIAL-MICRO]  28.96,46.48 0 bottom
JP99  FIDUCIALUFIDUCIAL  [FIDUCIAL-MICRO]  37.69,32.11 0 bottom
JP100  input  [JST-2-SMD]  43.94,51.82 0 top
JP101  [1X03_NO_SILK]  47.75,41.66 270 bottom
JP102  [1X03_NO_SILK]  40.13,41.66 270 bottom
JP103  SFE_LOGO_FLAME.1_INCH  [SFE_LOGO_FLAME_.1]  43.94,50.24 0 bottom
JP104  [1X02_NO_SILK]  45.21,44.2 0 bottom
JP105  FIDUCIALUFIDUCIAL  [FIDUCIAL-MICRO]  48.36,32.11 0 top
JP106  FIDUCIALUFIDUCIAL  [FIDUCIAL-MICRO]  39.62,46.48 0 top
JP107  FIDUCIALUFIDUCIAL  [FIDUCIAL-MICRO]  39.62,46.48 0 bottom
JP108  FIDUCIALUFIDUCIAL  [FIDUCIAL-MICRO]  48.36,32.11 0 bottom
JP109  input  [JST-2-SMD]  54.61,51.82 0 top
JP110  [1X03_NO_SILK]  58.42,41.66 270 bottom
JP111  [1X03_NO_SILK]  50.8,41.66 270 bottom
JP112  SFE_LOGO_FLAME.1_INCH  [SFE_LOGO_FLAME_.1]  54.61,50.24 0 bottom
JP113  [1X02_NO_SILK]  55.88,44.2 0 bottom
JP114  FIDUCIALUFIDUCIAL  [FIDUCIAL-MICRO]  59.03,32.11 0 top
JP115  FIDUCIALUFIDUCIAL  [FIDUCIAL-MICRO]  50.29,46.48 0 top
JP116  FIDUCIALUFIDUCIAL  [FIDUCIAL-MICRO]  50.29,46.48 0 bottom
JP117  FIDUCIALUFIDUCIAL  [FIDUCIAL-MICRO]  59.03,32.11 0 bottom
JP118  input  [JST-2-SMD]  65.28,51.82 0 top
JP119  [1X03_NO_SILK]  69.09,41.66 270 bottom
JP120  [1X03_NO_SILK]  61.47,41.66 270 bottom
JP121  SFE_LOGO_FLAME.1_INCH  [SFE_LOGO_FLAME_.1]  65.28,50.24 0 bottom
JP122  [1X02_NO_SILK]  66.55,44.2 0 bottom
JP123  FIDUCIALUFIDUCIAL  [FIDUCIAL-MICRO]  69.7,32.11 0 top
JP124  FIDUCIALUFIDUCIAL  [FIDUCIAL-MICRO]  60.96,46.48 0 top
JP125  FIDUCIALUFIDUCIAL  [FIDUCIAL-MICRO]  60.96,46.48 0 bottom
JP126  FIDUCIALUFIDUCIAL  [FIDUCIAL-MICRO]  69.7,32.11 0 bottom
JP127  input  [JST-2-SMD]  75.95,51.82 0 top
JP128  [1X03_NO_SILK]  79.76,41.66 270 bottom
JP129  [1X03_NO_SILK]  72.14,41.66 270 bottom
JP130  SFE_LOGO_FLAME.1_INCH  [SFE_LOGO_FLAME_.1]  75.95,50.24 0 bottom
JP131  [1X02_NO_SILK]  77.22,44.2 0 bottom
JP132  FIDUCIALUFIDUCIAL  [FIDUCIAL-MICRO]  80.37,32.11 0 top
JP133  FIDUCIALUFIDUCIAL  [FIDUCIAL-MICRO]  71.63,46.48 0 top
JP134  FIDUCIALUFIDUCIAL  [FIDUCIAL-MICRO]  71.63,46.48 0 bottom
JP135  FIDUCIALUFIDUCIAL  [FIDUCIAL-MICRO]  80.37,32.11 0 bottom
JP136  input  [JST-2-SMD]  86.61,51.82 0 top
JP137  [1X03_NO_SILK]  90.42,41.66 270 bottom
JP138  [1X03_NO_SILK]  82.8,41.66 270 bottom
JP139  SFE_LOGO_FLAME.1_INCH  [SFE_LOGO_FLAME_.1]  86.61,50.24 0 bottom
JP140  [1X02_NO_SILK]  87.88,44.2 0 bottom
JP141  FIDUCIALUFIDUCIAL  [FIDUCIAL-MICRO]  91.03,32.11 0 top
JP142  FIDUCIALUFIDUCIAL  [FIDUCIAL-MICRO]  82.3,46.48 0 top
JP143  FIDUCIALUFIDUCIAL  [FIDUCIAL-MICRO]  82.3,46.48 0 bottom
JP144  FIDUCIALUFIDUCIAL  [FIDUCIAL-MICRO]  91.03,32.11 0 bottom
JP145  input  [JST-2-SMD]  11.94,76.45 0 top
JP146  [1X03_NO_SILK]  15.75,66.29 270 bottom
JP147  [1X03_NO_SILK]  8.13,66.29 270 bottom
JP148  SFE_LOGO_FLAME.1_INCH  [SFE_LOGO_FLAME_.1]  11.94,74.88 0 bottom
JP149  [1X02_NO_SILK]  13.21,68.83 0 bottom
JP150  FIDUCIALUFIDUCIAL  [FIDUCIAL-MICRO]  16.36,56.74 0 top
JP151  FIDUCIALUFIDUCIAL  [FIDUCIAL-MICRO]  7.62,71.12 0 top
JP152  FIDUCIALUFIDUCIAL  [FIDUCIAL-MICRO]  7.62,71.12 0 bottom
JP153  FIDUCIALUFIDUCIAL  [FIDUCIAL-MICRO]  16.36,56.74 0 bottom
JP154  input  [JST-2-SMD]  22.61,76.45 0 top
JP155  [1X03_NO_SILK]  26.42,66.29 270 bottom
JP156  [1X03_NO_SILK]  18.8,66.29 270 bottom
JP157  SFE_LOGO_FLAME.1_INCH  [SFE_LOGO_FLAME_.1]  22.61,74.88 0 bottom
JP158  [1X02_NO_SILK]  23.88,68.83 0 bottom
JP159  FIDUCIALUFIDUCIAL  [FIDUCIAL-MICRO]  27.03,56.74 0 top
JP160  FIDUCIALUFIDUCIAL  [FIDUCIAL-MICRO]  18.29,71.12 0 top
JP161  FIDUCIALUFIDUCIAL  [FIDUCIAL-MICRO]  18.29,71.12 0 bottom
JP162  FIDUCIALUFIDUCIAL  [FIDUCIAL-MICRO]  27.03,56.74 0 bottom
JP163  input  [JST-2-SMD]  33.27,76.45 0 top
JP164  [1X03_NO_SILK]  37.08,66.29 270 bottom
JP165  [1X03_NO_SILK]  29.46,66.29 270 bottom
JP166  SFE_LOGO_FLAME.1_INCH  [SFE_LOGO_FLAME_.1]  33.27,74.88 0 bottom
JP167  [1X02_NO_SILK]  34.54,68.83 0 bottom
JP168  FIDUCIALUFIDUCIAL  [FIDUCIAL-MICRO]  37.69,56.74 0 top
JP169  FIDUCIALUFIDUCIAL  [FIDUCIAL-MICRO]  28.96,71.12 0 top
JP170  FIDUCIALUFIDUCIAL  [FIDUCIAL-MICRO]  28.96,71.12 0 bottom
JP171  FIDUCIALUFIDUCIAL  [FIDUCIAL-MICRO]  37.69,56.74 0 bottom
JP172  input  [JST-2-SMD]  43.94,76.45 0 top
JP173  [1X03_NO_SILK]  47.75,66.29 270 bottom
JP174  [1X03_NO_SILK]  40.13,66.29 270 bottom
JP175  SFE_LOGO_FLAME.1_INCH  [SFE_LOGO_FLAME_.1]  43.94,74.88 0 bottom
JP176  [1X02_NO_SILK]  45.21,68.83 0 bottom
JP177  FIDUCIALUFIDUCIAL  [FIDUCIAL-MICRO]  48.36,56.74 0 top
JP178  FIDUCIALUFIDUCIAL  [FIDUCIAL-MICRO]  39.62,71.12 0 top
JP179  FIDUCIALUFIDUCIAL  [FIDUCIAL-MICRO]  39.62,71.12 0 bottom
JP180  FIDUCIALUFIDUCIAL  [FIDUCIAL-MICRO]  48.36,56.74 0 bottom
JP181  input  [JST-2-SMD]  54.61,76.45 0 top
JP182  [1X03_NO_SILK]  58.42,66.29 270 bottom
JP183  [1X03_NO_SILK]  50.8,66.29 270 bottom
JP184  SFE_LOGO_FLAME.1_INCH  [SFE_LOGO_FLAME_.1]  54.61,74.88 0 bottom
JP185  [1X02_NO_SILK]  55.88,68.83 0 bottom
JP186  FIDUCIALUFIDUCIAL  [FIDUCIAL-MICRO]  59.03,56.74 0 top
JP187  FIDUCIALUFIDUCIAL  [FIDUCIAL-MICRO]  50.29,71.12 0 top
JP188  FIDUCIALUFIDUCIAL  [FIDUCIAL-MICRO]  50.29,71.12 0 bottom
JP189  FIDUCIALUFIDUCIAL  [FIDUCIAL-MICRO]  59.03,56.74 0 bottom
JP190  input  [JST-2-SMD]  65.28,76.45 0 top
JP191  [1X03_NO_SILK]  69.09,66.29 270 bottom
JP192  [1X03_NO_SILK]  61.47,66.29 270 bottom
JP193  SFE_LOGO_FLAME.1_INCH  [SFE_LOGO_FLAME_.1]  65.28,74.88 0 bottom
JP194  [1X02_NO_SILK]  66.55,68.83 0 bottom
JP195  FIDUCIALUFIDUCIAL  [FIDUCIAL-MICRO]  69.7,56.74 0 top
JP196  FIDUCIALUFIDUCIAL  [FIDUCIAL-MICRO]  60.96,71.12 0 top
JP197  FIDUCIALUFIDUCIAL  [FIDUCIAL-MICRO]  60.96,71.12 0 bottom
JP198  FIDUCIALUFIDUCIAL  [FIDUCIAL-MICRO]  69.7,56.74 0 bottom
JP199  input  [JST-2-SMD]  75.95,76.45 0 top
JP200  [1X03_NO_SILK]  79.76,66.29 270 bottom
JP201  [1X03_NO_SILK]  72.14,66.29 270 bottom
JP202  SFE_LOGO_FLAME.1_INCH  [SFE_LOGO_FLAME_.1]  75.95,74.88 0 bottom
JP203  [1X02_NO_SILK]  77.22,68.83 0 bottom
JP204  FIDUCIALUFIDUCIAL  [FIDUCIAL-MICRO]  80.37,56.74 0 top
JP205  FIDUCIALUFIDUCIAL  [FIDUCIAL-MICRO]  71.63,71.12 0 top
JP206  FIDUCIALUFIDUCIAL  [FIDUCIAL-MICRO]  71.63,71.12 0 bottom
JP207  FIDUCIALUFIDUCIAL  [FIDUCIAL-MICRO]  80.37,56.74 0 bottom
JP208  input  [JST-2-SMD]  86.61,76.45 0 top
JP209  [1X03_NO_SILK]  90.42,66.29 270 bottom
JP210  [1X03_NO_SILK]  82.8,66.29 270 bottom
JP211  SFE_LOGO_FLAME.1_INCH  [SFE_LOGO_FLAME_.1]  86.61,74.88 0 bottom
JP212  [1X02_NO_SILK]  87.88,68.83 0 bottom
JP213  FIDUCIALUFIDUCIAL  [FIDUCIAL-MICRO]  91.03,56.74 0 top
JP214  FIDUCIALUFIDUCIAL  [FIDUCIAL-MICRO]  82.3,71.12 0 top
JP215  FIDUCIALUFIDUCIAL  [FIDUCIAL-MICRO]  82.3,71.12 0 bottom
JP216  FIDUCIALUFIDUCIAL  [FIDUCIAL-MICRO]  91.03,56.74 0 bottom
JP217  input  [JST-2-SMD]  11.94,101.09 0 top
JP218  [1X03_NO_SILK]  15.75,90.93 270 bottom
JP219  [1X03_NO_SILK]  8.13,90.93 270 bottom
JP220  SFE_LOGO_FLAME.1_INCH  [SFE_LOGO_FLAME_.1]  11.94,99.52 0 bottom
JP221  [1X02_NO_SILK]  13.21,93.47 0 bottom
JP222  FIDUCIALUFIDUCIAL  [FIDUCIAL-MICRO]  16.36,81.38 0 top
JP223  FIDUCIALUFIDUCIAL  [FIDUCIAL-MICRO]  7.62,95.76 0 top
JP224  FIDUCIALUFIDUCIAL  [FIDUCIAL-MICRO]  7.62,95.76 0 bottom
JP225  FIDUCIALUFIDUCIAL  [FIDUCIAL-MICRO]  16.36,81.38 0 bottom
JP226  input  [JST-2-SMD]  22.61,101.09 0 top
JP227  [1X03_NO_SILK]  26.42,90.93 270 bottom
JP228  [1X03_NO_SILK]  18.8,90.93 270 bottom
JP229  SFE_LOGO_FLAME.1_INCH  [SFE_LOGO_FLAME_.1]  22.61,99.52 0 bottom
JP230  [1X02_NO_SILK]  23.88,93.47 0 bottom
JP231  FIDUCIALUFIDUCIAL  [FIDUCIAL-MICRO]  27.03,81.38 0 top
JP232  FIDUCIALUFIDUCIAL  [FIDUCIAL-MICRO]  18.29,95.76 0 top
JP233  FIDUCIALUFIDUCIAL  [FIDUCIAL-MICRO]  18.29,95.76 0 bottom
JP234  FIDUCIALUFIDUCIAL  [FIDUCIAL-MICRO]  27.03,81.38 0 bottom
JP235  input  [JST-2-SMD]  33.27,101.09 0 top
JP236  [1X03_NO_SILK]  37.08,90.93 270 bottom
JP237  [1X03_NO_SILK]  29.46,90.93 270 bottom
JP238  SFE_LOGO_FLAME.1_INCH  [SFE_LOGO_FLAME_.1]  33.27,99.52 0 bottom
JP239  [1X02_NO_SILK]  34.54,93.47 0 bottom
JP240  FIDUCIALUFIDUCIAL  [FIDUCIAL-MICRO]  37.69,81.38 0 top
JP241  FIDUCIALUFIDUCIAL  [FIDUCIAL-MICRO]  28.96,95.76 0 top
JP242  FIDUCIALUFIDUCIAL  [FIDUCIAL-MICRO]  28.96,95.76 0 bottom
JP243  FIDUCIALUFIDUCIAL  [FIDUCIAL-MICRO]  37.69,81.38 0 bottom
JP244  input  [JST-2-SMD]  43.94,101.09 0 top
JP245  [1X03_NO_SILK]  47.75,90.93 270 bottom
JP246  [1X03_NO_SILK]  40.13,90.93 270 bottom
JP247  SFE_LOGO_FLAME.1_INCH  [SFE_LOGO_FLAME_.1]  43.94,99.52 0 bottom
JP248  [1X02_NO_SILK]  45.21,93.47 0 bottom
JP249  FIDUCIALUFIDUCIAL  [FIDUCIAL-MICRO]  48.36,81.38 0 top
JP250  FIDUCIALUFIDUCIAL  [FIDUCIAL-MICRO]  39.62,95.76 0 top
JP251  FIDUCIALUFIDUCIAL  [FIDUCIAL-MICRO]  39.62,95.76 0 bottom
JP252  FIDUCIALUFIDUCIAL  [FIDUCIAL-MICRO]  48.36,81.38 0 bottom
JP253  input  [JST-2-SMD]  54.61,101.09 0 top
JP254  [1X03_NO_SILK]  58.42,90.93 270 bottom
JP255  [1X03_NO_SILK]  50.8,90.93 270 bottom
JP256  SFE_LOGO_FLAME.1_INCH  [SFE_LOGO_FLAME_.1]  54.61,99.52 0 bottom
JP257  [1X02_NO_SILK]  55.88,93.47 0 bottom
JP258  FIDUCIALUFIDUCIAL  [FIDUCIAL-MICRO]  59.03,81.38 0 top
JP259  FIDUCIALUFIDUCIAL  [FIDUCIAL-MICRO]  50.29,95.76 0 top
JP260  FIDUCIALUFIDUCIAL  [FIDUCIAL-MICRO]  50.29,95.76 0 bottom
JP261  FIDUCIALUFIDUCIAL  [FIDUCIAL-MICRO]  59.03,81.38 0 bottom
JP262  input  [JST-2-SMD]  65.28,101.09 0 top
JP263  [1X03_NO_SILK]  69.09,90.93 270 bottom
JP264  [1X03_NO_SILK]  61.47,90.93 270 bottom
JP265  SFE_LOGO_FLAME.1_INCH  [SFE_LOGO_FLAME_.1]  65.28,99.52 0 bottom
JP266  [1X02_NO_SILK]  66.55,93.47 0 bottom
JP267  FIDUCIALUFIDUCIAL  [FIDUCIAL-MICRO]  69.7,81.38 0 top
JP268  FIDUCIALUFIDUCIAL  [FIDUCIAL-MICRO]  60.96,95.76 0 top
JP269  FIDUCIALUFIDUCIAL  [FIDUCIAL-MICRO]  60.96,95.76 0 bottom
JP270  FIDUCIALUFIDUCIAL  [FIDUCIAL-MICRO]  69.7,81.38 0 bottom
JP271  input  [JST-2-SMD]  75.95,101.09 0 top
JP272  [1X03_NO_SILK]  79.76,90.93 270 bottom
JP273  [1X03_NO_SILK]  72.14,90.93 270 bottom
JP274  SFE_LOGO_FLAME.1_INCH  [SFE_LOGO_FLAME_.1]  75.95,99.52 0 bottom
JP275  [1X02_NO_SILK]  77.22,93.47 0 bottom
JP276  FIDUCIALUFIDUCIAL  [FIDUCIAL-MICRO]  80.37,81.38 0 top
JP277  FIDUCIALUFIDUCIAL  [FIDUCIAL-MICRO]  71.63,95.76 0 top
JP278  FIDUCIALUFIDUCIAL  [FIDUCIAL-MICRO]  71.63,95.76 0 bottom
JP279  FIDUCIALUFIDUCIAL  [FIDUCIAL-MICRO]  80.37,81.38 0 bottom
JP280  input  [JST-2-SMD]  86.61,101.09 0 top
JP281  [1X03_NO_SILK]  90.42,90.93 270 bottom
JP282  [1X03_NO_SILK]  82.8,90.93 270 bottom
JP283  SFE_LOGO_FLAME.1_INCH  [SFE_LOGO_FLAME_.1]  86.61,99.52 0 bottom
JP284  [1X02_NO_SILK]  87.88,93.47 0 bottom
JP285  FIDUCIALUFIDUCIAL  [FIDUCIAL-MICRO]  91.03,81.38 0 top
JP286  FIDUCIALUFIDUCIAL  [FIDUCIAL-MICRO]  82.3,95.76 0 top
JP287  FIDUCIALUFIDUCIAL  [FIDUCIAL-MICRO]  82.3,95.76 0 bottom
JP288  FIDUCIALUFIDUCIAL  [FIDUCIAL-MICRO]  91.03,81.38 0 bottom
JP289  input  [JST-2-SMD]  11.94,125.73 0 top
JP290  [1X03_NO_SILK]  15.75,115.57 270 bottom
JP291  [1X03_NO_SILK]  8.13,115.57 270 bottom
JP292  SFE_LOGO_FLAME.1_INCH  [SFE_LOGO_FLAME_.1]  11.94,124.16 0 bottom
JP293  [1X02_NO_SILK]  13.21,118.11 0 bottom
JP294  FIDUCIALUFIDUCIAL  [FIDUCIAL-MICRO]  16.36,106.02 0 top
JP295  FIDUCIALUFIDUCIAL  [FIDUCIAL-MICRO]  7.62,120.4 0 top
JP296  FIDUCIALUFIDUCIAL  [FIDUCIAL-MICRO]  7.62,120.4 0 bottom
JP297  FIDUCIALUFIDUCIAL  [FIDUCIAL-MICRO]  16.36,106.02 0 bottom
JP298  input  [JST-2-SMD]  22.61,125.73 0 top
JP299  [1X03_NO_SILK]  26.42,115.57 270 bottom
JP300  [1X03_NO_SILK]  18.8,115.57 270 bottom
JP301  SFE_LOGO_FLAME.1_INCH  [SFE_LOGO_FLAME_.1]  22.61,124.16 0 bottom
JP302  [1X02_NO_SILK]  23.88,118.11 0 bottom
JP303  FIDUCIALUFIDUCIAL  [FIDUCIAL-MICRO]  27.03,106.02 0 top
JP304  FIDUCIALUFIDUCIAL  [FIDUCIAL-MICRO]  18.29,120.4 0 top
JP305  FIDUCIALUFIDUCIAL  [FIDUCIAL-MICRO]  18.29,120.4 0 bottom
JP306  FIDUCIALUFIDUCIAL  [FIDUCIAL-MICRO]  27.03,106.02 0 bottom
JP307  input  [JST-2-SMD]  33.27,125.73 0 top
JP308  [1X03_NO_SILK]  37.08,115.57 270 bottom
JP309  [1X03_NO_SILK]  29.46,115.57 270 bottom
JP310  SFE_LOGO_FLAME.1_INCH  [SFE_LOGO_FLAME_.1]  33.27,124.16 0 bottom
JP311  [1X02_NO_SILK]  34.54,118.11 0 bottom
JP312  FIDUCIALUFIDUCIAL  [FIDUCIAL-MICRO]  37.69,106.02 0 top
JP313  FIDUCIALUFIDUCIAL  [FIDUCIAL-MICRO]  28.96,120.4 0 top
JP314  FIDUCIALUFIDUCIAL  [FIDUCIAL-MICRO]  28.96,120.4 0 bottom
JP315  FIDUCIALUFIDUCIAL  [FIDUCIAL-MICRO]  37.69,106.02 0 bottom
JP316  input  [JST-2-SMD]  43.94,125.73 0 top
JP317  [1X03_NO_SILK]  47.75,115.57 270 bottom
JP318  [1X03_NO_SILK]  40.13,115.57 270 bottom
JP319  SFE_LOGO_FLAME.1_INCH  [SFE_LOGO_FLAME_.1]  43.94,124.16 0 bottom
JP320  [1X02_NO_SILK]  45.21,118.11 0 bottom
JP321  FIDUCIALUFIDUCIAL  [FIDUCIAL-MICRO]  48.36,106.02 0 top
JP322  FIDUCIALUFIDUCIAL  [FIDUCIAL-MICRO]  39.62,120.4 0 top
JP323  FIDUCIALUFIDUCIAL  [FIDUCIAL-MICRO]  39.62,120.4 0 bottom
JP324  FIDUCIALUFIDUCIAL  [FIDUCIAL-MICRO]  48.36,106.02 0 bottom
JP325  input  [JST-2-SMD]  54.61,125.73 0 top
JP326  [1X03_NO_SILK]  58.42,115.57 270 bottom
JP327  [1X03_NO_SILK]  50.8,115.57 270 bottom
JP328  SFE_LOGO_FLAME.1_INCH  [SFE_LOGO_FLAME_.1]  54.61,124.16 0 bottom
JP329  [1X02_NO_SILK]  55.88,118.11 0 bottom
JP330  FIDUCIALUFIDUCIAL  [FIDUCIAL-MICRO]  59.03,106.02 0 top
JP331  FIDUCIALUFIDUCIAL  [FIDUCIAL-MICRO]  50.29,120.4 0 top
JP332  FIDUCIALUFIDUCIAL  [FIDUCIAL-MICRO]  50.29,120.4 0 bottom
JP333  FIDUCIALUFIDUCIAL  [FIDUCIAL-MICRO]  59.03,106.02 0 bottom
JP334  input  [JST-2-SMD]  65.28,125.73 0 top
JP335  [1X03_NO_SILK]  69.09,115.57 270 bottom
JP336  [1X03_NO_SILK]  61.47,115.57 270 bottom
JP337  SFE_LOGO_FLAME.1_INCH  [SFE_LOGO_FLAME_.1]  65.28,124.16 0 bottom
JP338  [1X02_NO_SILK]  66.55,118.11 0 bottom
JP339  FIDUCIALUFIDUCIAL  [FIDUCIAL-MICRO]  69.7,106.02 0 top
JP340  FIDUCIALUFIDUCIAL  [FIDUCIAL-MICRO]  60.96,120.4 0 top
JP341  FIDUCIALUFIDUCIAL  [FIDUCIAL-MICRO]  60.96,120.4 0 bottom
JP342  FIDUCIALUFIDUCIAL  [FIDUCIAL-MICRO]  69.7,106.02 0 bottom
JP343  input  [JST-2-SMD]  75.95,125.73 0 top
JP344  [1X03_NO_SILK]  79.76,115.57 270 bottom
JP345  [1X03_NO_SILK]  72.14,115.57 270 bottom
JP346  SFE_LOGO_FLAME.1_INCH  [SFE_LOGO_FLAME_.1]  75.95,124.16 0 bottom
JP347  [1X02_NO_SILK]  77.22,118.11 0 bottom
JP348  FIDUCIALUFIDUCIAL  [FIDUCIAL-MICRO]  80.37,106.02 0 top
JP349  FIDUCIALUFIDUCIAL  [FIDUCIAL-MICRO]  71.63,120.4 0 top
JP350  FIDUCIALUFIDUCIAL  [FIDUCIAL-MICRO]  71.63,120.4 0 bottom
JP351  FIDUCIALUFIDUCIAL  [FIDUCIAL-MICRO]  80.37,106.02 0 bottom
JP352  input  [JST-2-SMD]  86.61,125.73 0 top
JP353  [1X03_NO_SILK]  90.42,115.57 270 bottom
JP354  [1X03_NO_SILK]  82.8,115.57 270 bottom
JP355  SFE_LOGO_FLAME.1_INCH  [SFE_LOGO_FLAME_.1]  86.61,124.16 0 bottom
JP356  [1X02_NO_SILK]  87.88,118.11 0 bottom
JP357  FIDUCIALUFIDUCIAL  [FIDUCIAL-MICRO]  91.03,106.02 0 top
JP358  FIDUCIALUFIDUCIAL  [FIDUCIAL-MICRO]  82.3,120.4 0 top
JP359  FIDUCIALUFIDUCIAL  [FIDUCIAL-MICRO]  82.3,120.4 0 bottom
JP360  FIDUCIALUFIDUCIAL  [FIDUCIAL-MICRO]  91.03,106.02 0 bottom
JP361  input  [JST-2-SMD]  11.94,150.37 0 top
JP362  [1X03_NO_SILK]  15.75,140.21 270 bottom
JP363  [1X03_NO_SILK]  8.13,140.21 270 bottom
JP364  SFE_LOGO_FLAME.1_INCH  [SFE_LOGO_FLAME_.1]  11.94,148.79 0 bottom
JP365  [1X02_NO_SILK]  13.21,142.75 0 bottom
JP366  FIDUCIALUFIDUCIAL  [FIDUCIAL-MICRO]  16.36,130.66 0 top
JP367  FIDUCIALUFIDUCIAL  [FIDUCIAL-MICRO]  7.62,145.03 0 top
JP368  FIDUCIALUFIDUCIAL  [FIDUCIAL-MICRO]  7.62,145.03 0 bottom
JP369  FIDUCIALUFIDUCIAL  [FIDUCIAL-MICRO]  16.36,130.66 0 bottom
JP370  input  [JST-2-SMD]  22.61,150.37 0 top
JP371  [1X03_NO_SILK]  26.42,140.21 270 bottom
JP372  [1X03_NO_SILK]  18.8,140.21 270 bottom
JP373  SFE_LOGO_FLAME.1_INCH  [SFE_LOGO_FLAME_.1]  22.61,148.79 0 bottom
JP374  [1X02_NO_SILK]  23.88,142.75 0 bottom
JP375  FIDUCIALUFIDUCIAL  [FIDUCIAL-MICRO]  27.03,130.66 0 top
JP376  FIDUCIALUFIDUCIAL  [FIDUCIAL-MICRO]  18.29,145.03 0 top
JP377  FIDUCIALUFIDUCIAL  [FIDUCIAL-MICRO]  18.29,145.03 0 bottom
JP378  FIDUCIALUFIDUCIAL  [FIDUCIAL-MICRO]  27.03,130.66 0 bottom
JP379  input  [JST-2-SMD]  33.27,150.37 0 top
JP380  [1X03_NO_SILK]  37.08,140.21 270 bottom
JP381  [1X03_NO_SILK]  29.46,140.21 270 bottom
JP382  SFE_LOGO_FLAME.1_INCH  [SFE_LOGO_FLAME_.1]  33.27,148.79 0 bottom
JP383  [1X02_NO_SILK]  34.54,142.75 0 bottom
JP384  FIDUCIALUFIDUCIAL  [FIDUCIAL-MICRO]  37.69,130.66 0 top
JP385  FIDUCIALUFIDUCIAL  [FIDUCIAL-MICRO]  28.96,145.03 0 top
JP386  FIDUCIALUFIDUCIAL  [FIDUCIAL-MICRO]  28.96,145.03 0 bottom
JP387  FIDUCIALUFIDUCIAL  [FIDUCIAL-MICRO]  37.69,130.66 0 bottom
JP388  input  [JST-2-SMD]  43.94,150.37 0 top
JP389  [1X03_NO_SILK]  47.75,140.21 270 bottom
JP390  [1X03_NO_SILK]  40.13,140.21 270 bottom
JP391  SFE_LOGO_FLAME.1_INCH  [SFE_LOGO_FLAME_.1]  43.94,148.79 0 bottom
JP392  [1X02_NO_SILK]  45.21,142.75 0 bottom
JP393  FIDUCIALUFIDUCIAL  [FIDUCIAL-MICRO]  48.36,130.66 0 top
JP394  FIDUCIALUFIDUCIAL  [FIDUCIAL-MICRO]  39.62,145.03 0 top
JP395  FIDUCIALUFIDUCIAL  [FIDUCIAL-MICRO]  39.62,145.03 0 bottom
JP396  FIDUCIALUFIDUCIAL  [FIDUCIAL-MICRO]  48.36,130.66 0 bottom
JP397  input  [JST-2-SMD]  54.61,150.37 0 top
JP398  [1X03_NO_SILK]  58.42,140.21 270 bottom
JP399  [1X03_NO_SILK]  50.8,140.21 270 bottom
JP400  SFE_LOGO_FLAME.1_INCH  [SFE_LOGO_FLAME_.1]  54.61,148.79 0 bottom
JP401  [1X02_NO_SILK]  55.88,142.75 0 bottom
JP402  FIDUCIALUFIDUCIAL  [FIDUCIAL-MICRO]  59.03,130.66 0 top
JP403  FIDUCIALUFIDUCIAL  [FIDUCIAL-MICRO]  50.29,145.03 0 top
JP404  FIDUCIALUFIDUCIAL  [FIDUCIAL-MICRO]  50.29,145.03 0 bottom
JP405  FIDUCIALUFIDUCIAL  [FIDUCIAL-MICRO]  59.03,130.66 0 bottom
JP406  input  [JST-2-SMD]  65.28,150.37 0 top
JP407  [1X03_NO_SILK]  69.09,140.21 270 bottom
JP408  [1X03_NO_SILK]  61.47,140.21 270 bottom
JP409  SFE_LOGO_FLAME.1_INCH  [SFE_LOGO_FLAME_.1]  65.28,148.79 0 bottom
JP410  [1X02_NO_SILK]  66.55,142.75 0 bottom
JP411  FIDUCIALUFIDUCIAL  [FIDUCIAL-MICRO]  69.7,130.66 0 top
JP412  FIDUCIALUFIDUCIAL  [FIDUCIAL-MICRO]  60.96,145.03 0 top
JP413  FIDUCIALUFIDUCIAL  [FIDUCIAL-MICRO]  60.96,145.03 0 bottom
JP414  FIDUCIALUFIDUCIAL  [FIDUCIAL-MICRO]  69.7,130.66 0 bottom
JP415  input  [JST-2-SMD]  75.95,150.37 0 top
JP416  [1X03_NO_SILK]  79.76,140.21 270 bottom
JP417  [1X03_NO_SILK]  72.14,140.21 270 bottom
JP418  SFE_LOGO_FLAME.1_INCH  [SFE_LOGO_FLAME_.1]  75.95,148.79 0 bottom
JP419  [1X02_NO_SILK]  77.22,142.75 0 bottom
JP420  FIDUCIALUFIDUCIAL  [FIDUCIAL-MICRO]  80.37,130.66 0 top
JP421  FIDUCIALUFIDUCIAL  [FIDUCIAL-MICRO]  71.63,145.03 0 top
JP422  FIDUCIALUFIDUCIAL  [FIDUCIAL-MICRO]  71.63,145.03 0 bottom
JP423  FIDUCIALUFIDUCIAL  [FIDUCIAL-MICRO]  80.37,130.66 0 bottom
JP424  input  [JST-2-SMD]  86.61,150.37 0 top
JP425  [1X03_NO_SILK]  90.42,140.21 270 bottom
JP426  [1X03_NO_SILK]  82.8,140.21 270 bottom
JP427  SFE_LOGO_FLAME.1_INCH  [SFE_LOGO_FLAME_.1]  86.61,148.79 0 bottom
JP428  [1X02_NO_SILK]  87.88,142.75 0 bottom
JP429  FIDUCIALUFIDUCIAL  [FIDUCIAL-MICRO]  91.03,130.66 0 top
JP430  FIDUCIALUFIDUCIAL  [FIDUCIAL-MICRO]  82.3,145.03 0 top
JP431  FIDUCIALUFIDUCIAL  [FIDUCIAL-MICRO]  82.3,145.03 0 bottom
JP432  FIDUCIALUFIDUCIAL  [FIDUCIAL-MICRO]  91.03,130.66 0 bottom
JP433  input  [JST-2-SMD]  11.94,175.01 0 top
JP434  [1X03_NO_SILK]  15.75,164.85 270 bottom
JP435  [1X03_NO_SILK]  8.13,164.85 270 bottom
JP436  SFE_LOGO_FLAME.1_INCH  [SFE_LOGO_FLAME_.1]  11.94,173.43 0 bottom
JP437  [1X02_NO_SILK]  13.21,167.39 0 bottom
JP438  FIDUCIALUFIDUCIAL  [FIDUCIAL-MICRO]  16.36,155.3 0 top
JP439  FIDUCIALUFIDUCIAL  [FIDUCIAL-MICRO]  7.62,169.67 0 top
JP440  FIDUCIALUFIDUCIAL  [FIDUCIAL-MICRO]  7.62,169.67 0 bottom
JP441  FIDUCIALUFIDUCIAL  [FIDUCIAL-MICRO]  16.36,155.3 0 bottom
JP442  input  [JST-2-SMD]  22.61,175.01 0 top
JP443  [1X03_NO_SILK]  26.42,164.85 270 bottom
JP444  [1X03_NO_SILK]  18.8,164.85 270 bottom
JP445  SFE_LOGO_FLAME.1_INCH  [SFE_LOGO_FLAME_.1]  22.61,173.43 0 bottom
JP446  [1X02_NO_SILK]  23.88,167.39 0 bottom
JP447  FIDUCIALUFIDUCIAL  [FIDUCIAL-MICRO]  27.03,155.3 0 top
JP448  FIDUCIALUFIDUCIAL  [FIDUCIAL-MICRO]  18.29,169.67 0 top
JP449  FIDUCIALUFIDUCIAL  [FIDUCIAL-MICRO]  18.29,169.67 0 bottom
JP450  FIDUCIALUFIDUCIAL  [FIDUCIAL-MICRO]  27.03,155.3 0 bottom
JP451  input  [JST-2-SMD]  33.27,175.01 0 top
JP452  [1X03_NO_SILK]  37.08,164.85 270 bottom
JP453  [1X03_NO_SILK]  29.46,164.85 270 bottom
JP454  SFE_LOGO_FLAME.1_INCH  [SFE_LOGO_FLAME_.1]  33.27,173.43 0 bottom
JP455  [1X02_NO_SILK]  34.54,167.39 0 bottom
JP456  FIDUCIALUFIDUCIAL  [FIDUCIAL-MICRO]  37.69,155.3 0 top
JP457  FIDUCIALUFIDUCIAL  [FIDUCIAL-MICRO]  28.96,169.67 0 top
JP458  FIDUCIALUFIDUCIAL  [FIDUCIAL-MICRO]  28.96,169.67 0 bottom
JP459  FIDUCIALUFIDUCIAL  [FIDUCIAL-MICRO]  37.69,155.3 0 bottom
JP460  input  [JST-2-SMD]  43.94,175.01 0 top
JP461  [1X03_NO_SILK]  47.75,164.85 270 bottom
JP462  [1X03_NO_SILK]  40.13,164.85 270 bottom
JP463  SFE_LOGO_FLAME.1_INCH  [SFE_LOGO_FLAME_.1]  43.94,173.43 0 bottom
JP464  [1X02_NO_SILK]  45.21,167.39 0 bottom
JP465  FIDUCIALUFIDUCIAL  [FIDUCIAL-MICRO]  48.36,155.3 0 top
JP466  FIDUCIALUFIDUCIAL  [FIDUCIAL-MICRO]  39.62,169.67 0 top
JP467  FIDUCIALUFIDUCIAL  [FIDUCIAL-MICRO]  39.62,169.67 0 bottom
JP468  FIDUCIALUFIDUCIAL  [FIDUCIAL-MICRO]  48.36,155.3 0 bottom
JP469  input  [JST-2-SMD]  54.61,175.01 0 top
JP470  [1X03_NO_SILK]  58.42,164.85 270 bottom
JP471  [1X03_NO_SILK]  50.8,164.85 270 bottom
JP472  SFE_LOGO_FLAME.1_INCH  [SFE_LOGO_FLAME_.1]  54.61,173.43 0 bottom
JP473  [1X02_NO_SILK]  55.88,167.39 0 bottom
JP474  FIDUCIALUFIDUCIAL  [FIDUCIAL-MICRO]  59.03,155.3 0 top
JP475  FIDUCIALUFIDUCIAL  [FIDUCIAL-MICRO]  50.29,169.67 0 top
JP476  FIDUCIALUFIDUCIAL  [FIDUCIAL-MICRO]  50.29,169.67 0 bottom
JP477  FIDUCIALUFIDUCIAL  [FIDUCIAL-MICRO]  59.03,155.3 0 bottom
JP478  input  [JST-2-SMD]  65.28,175.01 0 top
JP479  [1X03_NO_SILK]  69.09,164.85 270 bottom
JP480  [1X03_NO_SILK]  61.47,164.85 270 bottom
JP481  SFE_LOGO_FLAME.1_INCH  [SFE_LOGO_FLAME_.1]  65.28,173.43 0 bottom
JP482  [1X02_NO_SILK]  66.55,167.39 0 bottom
JP483  FIDUCIALUFIDUCIAL  [FIDUCIAL-MICRO]  69.7,155.3 0 top
JP484  FIDUCIALUFIDUCIAL  [FIDUCIAL-MICRO]  60.96,169.67 0 top
JP485  FIDUCIALUFIDUCIAL  [FIDUCIAL-MICRO]  60.96,169.67 0 bottom
JP486  FIDUCIALUFIDUCIAL  [FIDUCIAL-MICRO]  69.7,155.3 0 bottom
JP487  input  [JST-2-SMD]  75.95,175.01 0 top
JP488  [1X03_NO_SILK]  79.76,164.85 270 bottom
JP489  [1X03_NO_SILK]  72.14,164.85 270 bottom
JP490  SFE_LOGO_FLAME.1_INCH  [SFE_LOGO_FLAME_.1]  75.95,173.43 0 bottom
JP491  [1X02_NO_SILK]  77.22,167.39 0 bottom
JP492  FIDUCIALUFIDUCIAL  [FIDUCIAL-MICRO]  80.37,155.3 0 top
JP493  FIDUCIALUFIDUCIAL  [FIDUCIAL-MICRO]  71.63,169.67 0 top
JP494  FIDUCIALUFIDUCIAL  [FIDUCIAL-MICRO]  71.63,169.67 0 bottom
JP495  FIDUCIALUFIDUCIAL  [FIDUCIAL-MICRO]  80.37,155.3 0 bottom
JP496  input  [JST-2-SMD]  86.61,175.01 0 top
JP497  [1X03_NO_SILK]  90.42,164.85 270 bottom
JP498  [1X03_NO_SILK]  82.8,164.85 270 bottom
JP499  SFE_LOGO_FLAME.1_INCH  [SFE_LOGO_FLAME_.1]  86.61,173.43 0 bottom
JP500  [1X02_NO_SILK]  87.88,167.39 0 bottom
JP501  FIDUCIALUFIDUCIAL  [FIDUCIAL-MICRO]  91.03,155.3 0 top
JP502  FIDUCIALUFIDUCIAL  [FIDUCIAL-MICRO]  82.3,169.67 0 top
JP503  FIDUCIALUFIDUCIAL  [FIDUCIAL-MICRO]  82.3,169.67 0 bottom
JP504  FIDUCIALUFIDUCIAL  [FIDUCIAL-MICRO]  91.03,155.3 0 bottom
JP505  input  [JST-2-SMD]  11.94,199.64 0 top
JP506  [1X03_NO_SILK]  15.75,189.48 270 bottom
JP507  [1X03_NO_SILK]  8.13,189.48 270 bottom
JP508  SFE_LOGO_FLAME.1_INCH  [SFE_LOGO_FLAME_.1]  11.94,198.07 0 bottom
JP509  [1X02_NO_SILK]  13.21,192.02 0 bottom
JP510  FIDUCIALUFIDUCIAL  [FIDUCIAL-MICRO]  16.36,179.93 0 top
JP511  FIDUCIALUFIDUCIAL  [FIDUCIAL-MICRO]  7.62,194.31 0 top
JP512  FIDUCIALUFIDUCIAL  [FIDUCIAL-MICRO]  7.62,194.31 0 bottom
JP513  FIDUCIALUFIDUCIAL  [FIDUCIAL-MICRO]  16.36,179.93 0 bottom
JP514  input  [JST-2-SMD]  22.61,199.64 0 top
JP515  [1X03_NO_SILK]  26.42,189.48 270 bottom
JP516  [1X03_NO_SILK]  18.8,189.48 270 bottom
JP517  SFE_LOGO_FLAME.1_INCH  [SFE_LOGO_FLAME_.1]  22.61,198.07 0 bottom
JP518  [1X02_NO_SILK]  23.88,192.02 0 bottom
JP519  FIDUCIALUFIDUCIAL  [FIDUCIAL-MICRO]  27.03,179.93 0 top
JP520  FIDUCIALUFIDUCIAL  [FIDUCIAL-MICRO]  18.29,194.31 0 top
JP521  FIDUCIALUFIDUCIAL  [FIDUCIAL-MICRO]  18.29,194.31 0 bottom
JP522  FIDUCIALUFIDUCIAL  [FIDUCIAL-MICRO]  27.03,179.93 0 bottom
JP523  input  [JST-2-SMD]  33.27,199.64 0 top
JP524  [1X03_NO_SILK]  37.08,189.48 270 bottom
JP525  [1X03_NO_SILK]  29.46,189.48 270 bottom
JP526  SFE_LOGO_FLAME.1_INCH  [SFE_LOGO_FLAME_.1]  33.27,198.07 0 bottom
JP527  [1X02_NO_SILK]  34.54,192.02 0 bottom
JP528  FIDUCIALUFIDUCIAL  [FIDUCIAL-MICRO]  37.69,179.93 0 top
JP529  FIDUCIALUFIDUCIAL  [FIDUCIAL-MICRO]  28.96,194.31 0 top
JP530  FIDUCIALUFIDUCIAL  [FIDUCIAL-MICRO]  28.96,194.31 0 bottom
JP531  FIDUCIALUFIDUCIAL  [FIDUCIAL-MICRO]  37.69,179.93 0 bottom
JP532  input  [JST-2-SMD]  43.94,199.64 0 top
JP533  [1X03_NO_SILK]  47.75,189.48 270 bottom
JP534  [1X03_NO_SILK]  40.13,189.48 270 bottom
JP535  SFE_LOGO_FLAME.1_INCH  [SFE_LOGO_FLAME_.1]  43.94,198.07 0 bottom
JP536  [1X02_NO_SILK]  45.21,192.02 0 bottom
JP537  FIDUCIALUFIDUCIAL  [FIDUCIAL-MICRO]  48.36,179.93 0 top
JP538  FIDUCIALUFIDUCIAL  [FIDUCIAL-MICRO]  39.62,194.31 0 top
JP539  FIDUCIALUFIDUCIAL  [FIDUCIAL-MICRO]  39.62,194.31 0 bottom
JP540  FIDUCIALUFIDUCIAL  [FIDUCIAL-MICRO]  48.36,179.93 0 bottom
JP541  input  [JST-2-SMD]  54.61,199.64 0 top
JP542  [1X03_NO_SILK]  58.42,189.48 270 bottom
JP543  [1X03_NO_SILK]  50.8,189.48 270 bottom
JP544  SFE_LOGO_FLAME.1_INCH  [SFE_LOGO_FLAME_.1]  54.61,198.07 0 bottom
JP545  [1X02_NO_SILK]  55.88,192.02 0 bottom
JP546  FIDUCIALUFIDUCIAL  [FIDUCIAL-MICRO]  59.03,179.93 0 top
JP547  FIDUCIALUFIDUCIAL  [FIDUCIAL-MICRO]  50.29,194.31 0 top
JP548  FIDUCIALUFIDUCIAL  [FIDUCIAL-MICRO]  50.29,194.31 0 bottom
JP549  FIDUCIALUFIDUCIAL  [FIDUCIAL-MICRO]  59.03,179.93 0 bottom
JP550  input  [JST-2-SMD]  65.28,199.64 0 top
JP551  [1X03_NO_SILK]  69.09,189.48 270 bottom
JP552  [1X03_NO_SILK]  61.47,189.48 270 bottom
JP553  SFE_LOGO_FLAME.1_INCH  [SFE_LOGO_FLAME_.1]  65.28,198.07 0 bottom
JP554  [1X02_NO_SILK]  66.55,192.02 0 bottom
JP555  FIDUCIALUFIDUCIAL  [FIDUCIAL-MICRO]  69.7,179.93 0 top
JP556  FIDUCIALUFIDUCIAL  [FIDUCIAL-MICRO]  60.96,194.31 0 top
JP557  FIDUCIALUFIDUCIAL  [FIDUCIAL-MICRO]  60.96,194.31 0 bottom
JP558  FIDUCIALUFIDUCIAL  [FIDUCIAL-MICRO]  69.7,179.93 0 bottom
JP559  input  [JST-2-SMD]  75.95,199.64 0 top
JP560  [1X03_NO_SILK]  79.76,189.48 270 bottom
JP561  [1X03_NO_SILK]  72.14,189.48 270 bottom
JP562  SFE_LOGO_FLAME.1_INCH  [SFE_LOGO_FLAME_.1]  75.95,198.07 0 bottom
JP563  [1X02_NO_SILK]  77.22,192.02 0 bottom
JP564  FIDUCIALUFIDUCIAL  [FIDUCIAL-MICRO]  80.37,179.93 0 top
JP565  FIDUCIALUFIDUCIAL  [FIDUCIAL-MICRO]  71.63,194.31 0 top
JP566  FIDUCIALUFIDUCIAL  [FIDUCIAL-MICRO]  71.63,194.31 0 bottom
JP567  FIDUCIALUFIDUCIAL  [FIDUCIAL-MICRO]  80.37,179.93 0 bottom
JP568  input  [JST-2-SMD]  86.61,199.64 0 top
JP569  [1X03_NO_SILK]  90.42,189.48 270 bottom
JP570  [1X03_NO_SILK]  82.8,189.48 270 bottom
JP571  SFE_LOGO_FLAME.1_INCH  [SFE_LOGO_FLAME_.1]  86.61,198.07 0 bottom
JP572  [1X02_NO_SILK]  87.88,192.02 0 bottom
JP573  FIDUCIALUFIDUCIAL  [FIDUCIAL-MICRO]  91.03,179.93 0 top
JP574  FIDUCIALUFIDUCIAL  [FIDUCIAL-MICRO]  82.3,194.31 0 top
JP575  FIDUCIALUFIDUCIAL  [FIDUCIAL-MICRO]  82.3,194.31 0 bottom
JP576  FIDUCIALUFIDUCIAL  [FIDUCIAL-MICRO]  91.03,179.93 0 bottom
LOGO1  SFE_LOGO_NAME_FLAMEBLANK  [BLANK]  -0.76,-8.38 0 top  (outside the outline)
LOGO2  SFE_LOGO_NAME_FLAMEBLANK  [BLANK]  9.91,-8.38 0 top  (outside the outline)
LOGO3  SFE_LOGO_NAME_FLAMEBLANK  [BLANK]  20.57,-8.38 0 top  (outside the outline)
LOGO4  SFE_LOGO_NAME_FLAMEBLANK  [BLANK]  31.24,-8.38 0 top  (outside the outline)
LOGO5  SFE_LOGO_NAME_FLAMEBLANK  [BLANK]  41.91,-8.38 0 top  (outside the outline)
LOGO6  SFE_LOGO_NAME_FLAMEBLANK  [BLANK]  52.58,-8.38 0 top  (outside the outline)
LOGO7  SFE_LOGO_NAME_FLAMEBLANK  [BLANK]  63.25,-8.38 0 top  (outside the outline)
LOGO8  SFE_LOGO_NAME_FLAMEBLANK  [BLANK]  73.91,-8.38 0 top  (outside the outline)
LOGO9  SFE_LOGO_NAME_FLAMEBLANK  [BLANK]  -0.76,16.26 0 top
LOGO10  SFE_LOGO_NAME_FLAMEBLANK  [BLANK]  9.91,16.26 0 top
LOGO11  SFE_LOGO_NAME_FLAMEBLANK  [BLANK]  20.57,16.26 0 top
LOGO12  SFE_LOGO_NAME_FLAMEBLANK  [BLANK]  31.24,16.26 0 top
LOGO13  SFE_LOGO_NAME_FLAMEBLANK  [BLANK]  41.91,16.26 0 top
LOGO14  SFE_LOGO_NAME_FLAMEBLANK  [BLANK]  52.58,16.26 0 top
LOGO15  SFE_LOGO_NAME_FLAMEBLANK  [BLANK]  63.25,16.26 0 top
LOGO16  SFE_LOGO_NAME_FLAMEBLANK  [BLANK]  73.91,16.26 0 top
LOGO17  SFE_LOGO_NAME_FLAMEBLANK  [BLANK]  -0.76,40.89 0 top
LOGO18  SFE_LOGO_NAME_FLAMEBLANK  [BLANK]  9.91,40.89 0 top
LOGO19  SFE_LOGO_NAME_FLAMEBLANK  [BLANK]  20.57,40.89 0 top
LOGO20  SFE_LOGO_NAME_FLAMEBLANK  [BLANK]  31.24,40.89 0 top
LOGO21  SFE_LOGO_NAME_FLAMEBLANK  [BLANK]  41.91,40.89 0 top
LOGO22  SFE_LOGO_NAME_FLAMEBLANK  [BLANK]  52.58,40.89 0 top
LOGO23  SFE_LOGO_NAME_FLAMEBLANK  [BLANK]  63.25,40.89 0 top
LOGO24  SFE_LOGO_NAME_FLAMEBLANK  [BLANK]  73.91,40.89 0 top
LOGO25  SFE_LOGO_NAME_FLAMEBLANK  [BLANK]  -0.76,65.53 0 top
LOGO26  SFE_LOGO_NAME_FLAMEBLANK  [BLANK]  9.91,65.53 0 top
LOGO27  SFE_LOGO_NAME_FLAMEBLANK  [BLANK]  20.57,65.53 0 top
LOGO28  SFE_LOGO_NAME_FLAMEBLANK  [BLANK]  31.24,65.53 0 top
LOGO29  SFE_LOGO_NAME_FLAMEBLANK  [BLANK]  41.91,65.53 0 top
LOGO30  SFE_LOGO_NAME_FLAMEBLANK  [BLANK]  52.58,65.53 0 top
LOGO31  SFE_LOGO_NAME_FLAMEBLANK  [BLANK]  63.25,65.53 0 top
LOGO32  SFE_LOGO_NAME_FLAMEBLANK  [BLANK]  73.91,65.53 0 top
LOGO33  SFE_LOGO_NAME_FLAMEBLANK  [BLANK]  -0.76,90.17 0 top
LOGO34  SFE_LOGO_NAME_FLAMEBLANK  [BLANK]  9.91,90.17 0 top
LOGO35  SFE_LOGO_NAME_FLAMEBLANK  [BLANK]  20.57,90.17 0 top
LOGO36  SFE_LOGO_NAME_FLAMEBLANK  [BLANK]  31.24,90.17 0 top
LOGO37  SFE_LOGO_NAME_FLAMEBLANK  [BLANK]  41.91,90.17 0 top
LOGO38  SFE_LOGO_NAME_FLAMEBLANK  [BLANK]  52.58,90.17 0 top
LOGO39  SFE_LOGO_NAME_FLAMEBLANK  [BLANK]  63.25,90.17 0 top
LOGO40  SFE_LOGO_NAME_FLAMEBLANK  [BLANK]  73.91,90.17 0 top
LOGO41  SFE_LOGO_NAME_FLAMEBLANK  [BLANK]  -0.76,114.81 0 top
LOGO42  SFE_LOGO_NAME_FLAMEBLANK  [BLANK]  9.91,114.81 0 top
LOGO43  SFE_LOGO_NAME_FLAMEBLANK  [BLANK]  20.57,114.81 0 top
LOGO44  SFE_LOGO_NAME_FLAMEBLANK  [BLANK]  31.24,114.81 0 top
LOGO45  SFE_LOGO_NAME_FLAMEBLANK  [BLANK]  41.91,114.81 0 top
LOGO46  SFE_LOGO_NAME_FLAMEBLANK  [BLANK]  52.58,114.81 0 top
LOGO47  SFE_LOGO_NAME_FLAMEBLANK  [BLANK]  63.25,114.81 0 top
LOGO48  SFE_LOGO_NAME_FLAMEBLANK  [BLANK]  73.91,114.81 0 top
LOGO49  SFE_LOGO_NAME_FLAMEBLANK  [BLANK]  -0.76,139.45 0 top
LOGO50  SFE_LOGO_NAME_FLAMEBLANK  [BLANK]  9.91,139.45 0 top
LOGO51  SFE_LOGO_NAME_FLAMEBLANK  [BLANK]  20.57,139.45 0 top
LOGO52  SFE_LOGO_NAME_FLAMEBLANK  [BLANK]  31.24,139.45 0 top
LOGO53  SFE_LOGO_NAME_FLAMEBLANK  [BLANK]  41.91,139.45 0 top
LOGO54  SFE_LOGO_NAME_FLAMEBLANK  [BLANK]  52.58,139.45 0 top
LOGO55  SFE_LOGO_NAME_FLAMEBLANK  [BLANK]  63.25,139.45 0 top
LOGO56  SFE_LOGO_NAME_FLAMEBLANK  [BLANK]  73.91,139.45 0 top
LOGO57  SFE_LOGO_NAME_FLAMEBLANK  [BLANK]  -0.76,164.08 0 top
LOGO58  SFE_LOGO_NAME_FLAMEBLANK  [BLANK]  9.91,164.08 0 top
LOGO59  SFE_LOGO_NAME_FLAMEBLANK  [BLANK]  20.57,164.08 0 top
LOGO60  SFE_LOGO_NAME_FLAMEBLANK  [BLANK]  31.24,164.08 0 top
LOGO61  SFE_LOGO_NAME_FLAMEBLANK  [BLANK]  41.91,164.08 0 top
LOGO62  SFE_LOGO_NAME_FLAMEBLANK  [BLANK]  52.58,164.08 0 top
LOGO63  SFE_LOGO_NAME_FLAMEBLANK  [BLANK]  63.25,164.08 0 top
LOGO64  SFE_LOGO_NAME_FLAMEBLANK  [BLANK]  73.91,164.08 0 top